# Altium PCB no.PcbDoc
Units mil, origin at the board's own origin, x right, y up, seen from the top; angles counter-clockwise.
Board outline 6000 x 4000 mil, 2 copper layers (Top Layer, Bottom Layer); 11 components, 14 nets, 38 pads, 0 vias.
Unrouted connection lines stored in the file: 20.
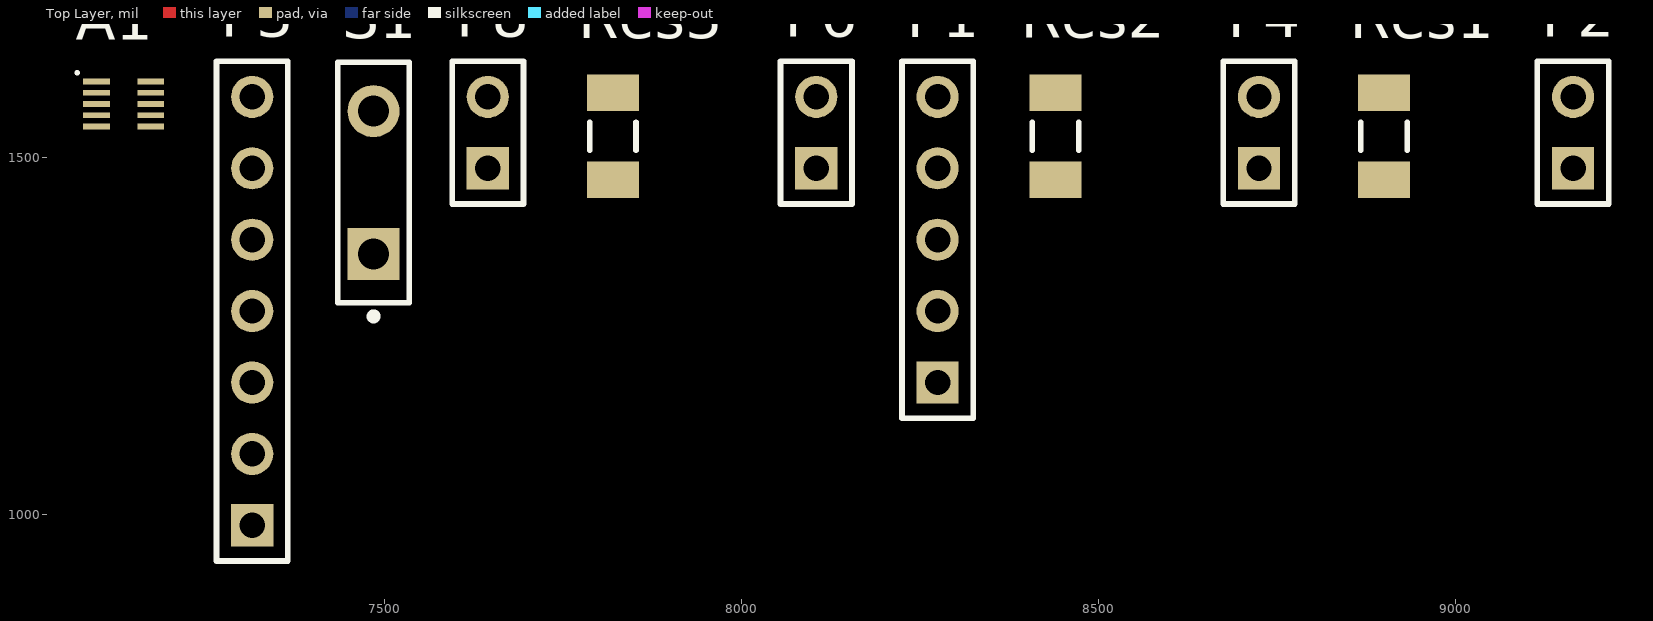
[diagram p0: Top Layer view]
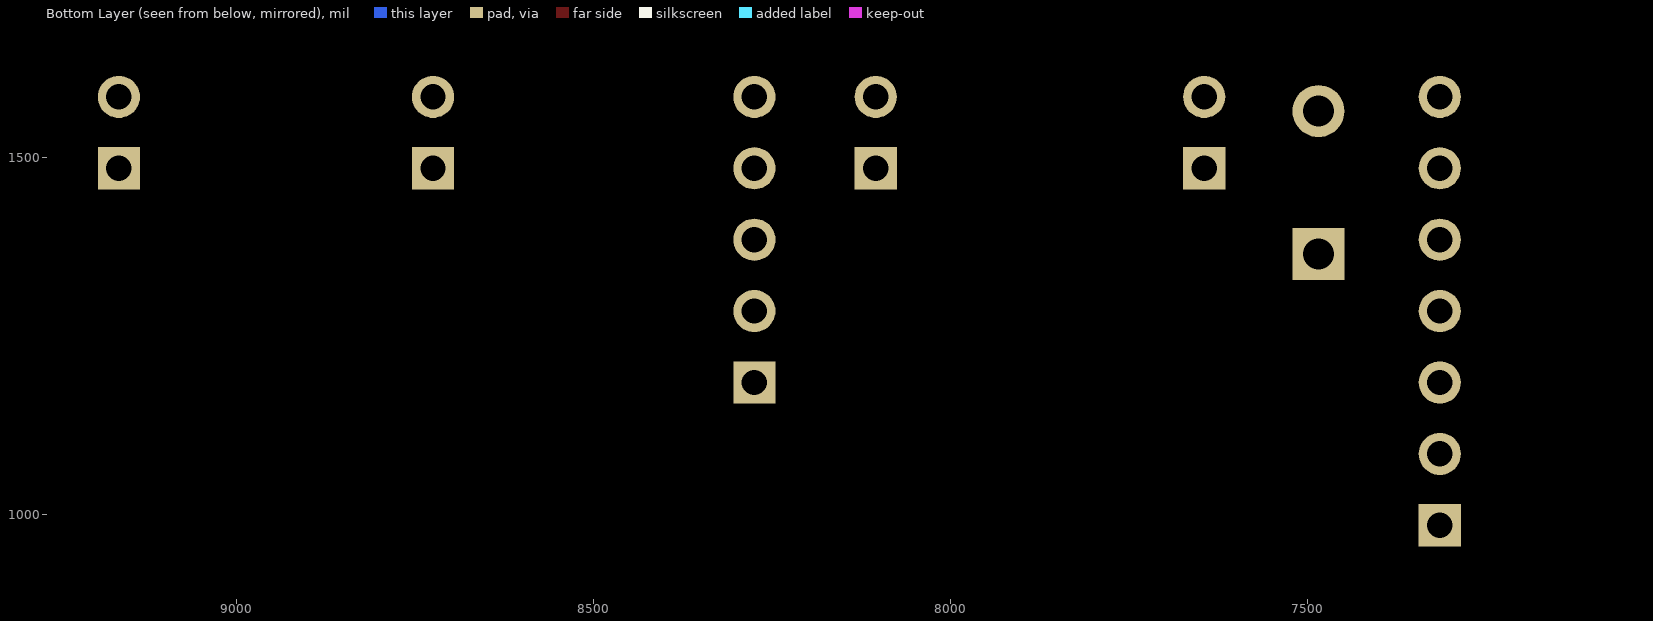
[diagram p1: Bottom Layer view, seen from below]

## Layer stack, top to bottom
Top Solder: solder mask 0.4, Solder Resist, Dk 3.5
Top Layer: signal copper 1.4
Dielectric 1: dielectric 12.6, FR-4, Dk 4.8
Bottom Layer: signal copper 1.4
Bottom Solder: solder mask 0.4, Solder Resist, Dk 3.5

## Board outline
1000,1000 7000,1000 7000,5000 1000,5000

## Design rules (kind name [scope] priority, off if disabled: settings)
Clearance Clearance_1 [All] p1: gap=10 ignorepadtopadclearanceinfootprint=FALSE except(0: Arc-Hole Track-Hole SMDPad-Hole THPad-Hole Via-Hole Fill-Hole Poly-Hole Region-Hole Text-Hole)
Clearance [All] p2: gap=10 ignorepadtopadclearanceinfootprint=FALSE except(0: Arc-Hole Track-Hole SMDPad-Hole THPad-Hole Via-Hole Fill-Hole Poly-Hole Region-Hole Text-Hole)
PolygonConnect [All] p1: connectstyle=Relief reliefconductorwidth=10 reliefentries=4 polygonreliefangle="90 Angle" airgapwidth=10
RoomDefinition Proto [InComponentClass('Proto')] p1: confinementstyle=ConfineIn formatcopy=TRUE lockcomponents=FALSE outline 7050,925 9240,925 9240,1745 7050,1745
RoutingVias [All] p1: holewidth=28 width=50 viastyle="Through Hole" minholewidth=28 minwidth=50 maxholewidth=28 maxwidth=50
SolderMaskExpansion [All] p1: expansion=4
Width [All] p1: maxlimit=10 minlimit=10 preferedwidth=10
30 further rules are at their usual default settings.

## Components (designator, comment, footprint, x,y, rotation, side; value= is the part's Value field where it differs from the comment)
A1 "ACCELERO" SON40P200X100-10M 7135,1575 r0 top
P1 "RFDUINO 2" HDR1X5 8275,1185 r90 top
P2 "LED1" HDR1X2 9165,1485 r90 top
P3 "RFDUINO 1" HDR1X7 7315,985 r90 top
P4 "LED2" HDR1X2 8725,1485 r90 top
P6 "LED3" HDR1X2 8105,1485 r90 top
P8 "BUZZER" HDR1X2 7645,1485 r90 top
Res1 "Resistor 330" RESC3116X06M 8900,1530 r90 top
Res2 "Resistor 330" RESC3116X06M 8440,1530 r90 top
Res3 "Resistor 330" RESC3116X06M 7820,1530 r90 top
S1 "SW-PB" SPST-2 7485,1465 r90 top

## Footprints (in the part's own frame and the unit in brackets; to place one, negate y for a bottom-side part, rotate by r counter-clockwise, add the part's x,y. Pads: shape width x height; smd on the part's side, far side on the other; paste and mask are expansions set on the pad)
HDR1X2 [mm] "Connector; Header; 2 Position"
  rect 1.5x1.5 hole 0.9: 1(0,0)
  round 1.5 hole 0.9: 2(2.54,0)
  silkscreen extent -1.27,-1.27 3.81,1.27
HDR1X5 [mm] "Connector; Header; 5 Position"
  rect 1.5x1.5 hole 0.9: 1(0,0)
  round 1.5 hole 0.9: 2(2.54,0) 3(5.08,0) 4(7.62,0) 5(10.16,0)
  silkscreen extent -1.27,-1.27 11.43,1.27
HDR1X7 [mm] "Connector; Header; 7 Position"
  rect 1.5x1.5 hole 0.9: 1(0,0)
  round 1.5 hole 0.9: 2(2.54,0) 3(5.08,0) 4(7.62,0) 5(10.16,0) 6(12.7,0) 7(15.24,0)
  silkscreen extent -1.27,-1.27 16.51,1.27
RESC3116X06M [mm] "Chip Resistor, 2-Leads, Body 3,15x1,60mm, IPC Low Density"
  rect 1.3x1.85 smd: 1(-1.55,0) 2(1.55,0)
  silkscreen extent -0.5,-0.82 0.5,0.82, body extent -1.65,-0.87 1.65,0.87, height 0.6
SON40P200X100-10M [mm] "SON, 10-Leads, Body 2,00x2,00mm, Pitch 0,40mm, IPC Low Density"
  rect 0.95x0.2 smd: 1(-0.965,0.8) 2(-0.965,0.4) 3(-0.965,0) 4(-0.965,-0.4) 5(-0.965,-0.8) 6(0.965,-0.8) 7(0.965,-0.4) 8(0.965,0) 9(0.965,0.4) 10(0.965,0.8)
  silkscreen extent -1.7,1.06 -1.6,1.16, body extent -1,-1 1,1, height 1
SPST-2 [mm] "Switch; 2 Leads"
  rect 1.85x1.85 hole 1.1: 1(-2.54,0)
  round 1.85 hole 1.1: 2(2.54,0)
  silkscreen extent -4.89,-1.27 4.28,1.27

## Part data
A1: library part MMA8653FCR1, "Accéléromètres 3-axis 2g/4g/8g 10 bit", Manufacturer="NXP / Freescale", Supplier Part Number=841-MMA8653FCR1, Manufacturer Part Member=MMA8653FCR1, Published=15/02/2017, Publisher="François Lefevre", Supplier=Mouser
P1: library part "Header 5", "Header, 5-Pin", LatestRevisionDate=17-Jul-2002, LatestRevisionNote="Re-released for DXP Platform.", Publisher="Altium Limited"
P2 P4 P6 P8: library part "Header 2", "Header, 2-Pin", LatestRevisionDate=17-Jul-2002, LatestRevisionNote="Re-released for DXP Platform.", Publisher="Altium Limited"
P3: library part "Header 7", "Header, 7-Pin", LatestRevisionDate=17-Jul-2002, LatestRevisionNote="Re-released for DXP Platform.", Publisher="Altium Limited"
Res1 Res2 Res3: library part CRCW1206330RFKEA, "Résistance CMS 330 Ohms  250 mW  size 1206 taille 3.2x1.6 mm série CRCW", Manufacturer=Mouser, Power="250 mW", Resistance="330 Ohms", Supplier Part Number=71-CRCW1206-330-E3, Temp./coefficient="100 ppm/K", Tolerance=1%, Manufacturer Part Number=CRCW1206330RFKEA, Published=16/02/2017, Publisher="François Lefevre", Supplier=Mouser
S1: "Switch", LatestRevisionDate=17-Jul-2002, LatestRevisionNote="Re-released for DXP Platform.", PackageDescription="Switch; 2 Leads", PackageReference=SPST-2, Published=24-Mar-1999, Publisher="Altium Limited"

## Nets (pads, with @x,y where several pads share a name; then routed paths per layer and width w, separated by ;. In a path a pad name is that pad's centre, name@x,y a point inside that pad or via, vN(x,y) a via of type N, cw(c..) or ccw(c..) an arc to the next point about the centre after c; other vN are vias at no path point)
GND: A1.6 A1.7 A1.9 P2.2 P3.7 P4.2 P6.2 P8.2
NetA1_2: A1.2 P1.3
NetA1_3: A1.3 P1.2
NetA1_10: A1.10 P1.4
NetP1_1: P1.1 P8.1
NetP1_5: P1.5 Res3.1
NetP2_1: P2.1 Res1.2
NetP3_1: P3.1 Res2.1
NetP3_2: P3.2
NetP3_3: P3.3
NetP3_4: P3.4 S1.2
NetP4_1: P4.1 Res2.2
NetP6_1: P6.1 Res3.2
VCC: A1.1 P3.5 Res1.1 S1.1
pads on no net: A1.4 A1.5 A1.8 P3.6